# EAGLE board module_interface_hat v54 (EAGLE 9.7.0)
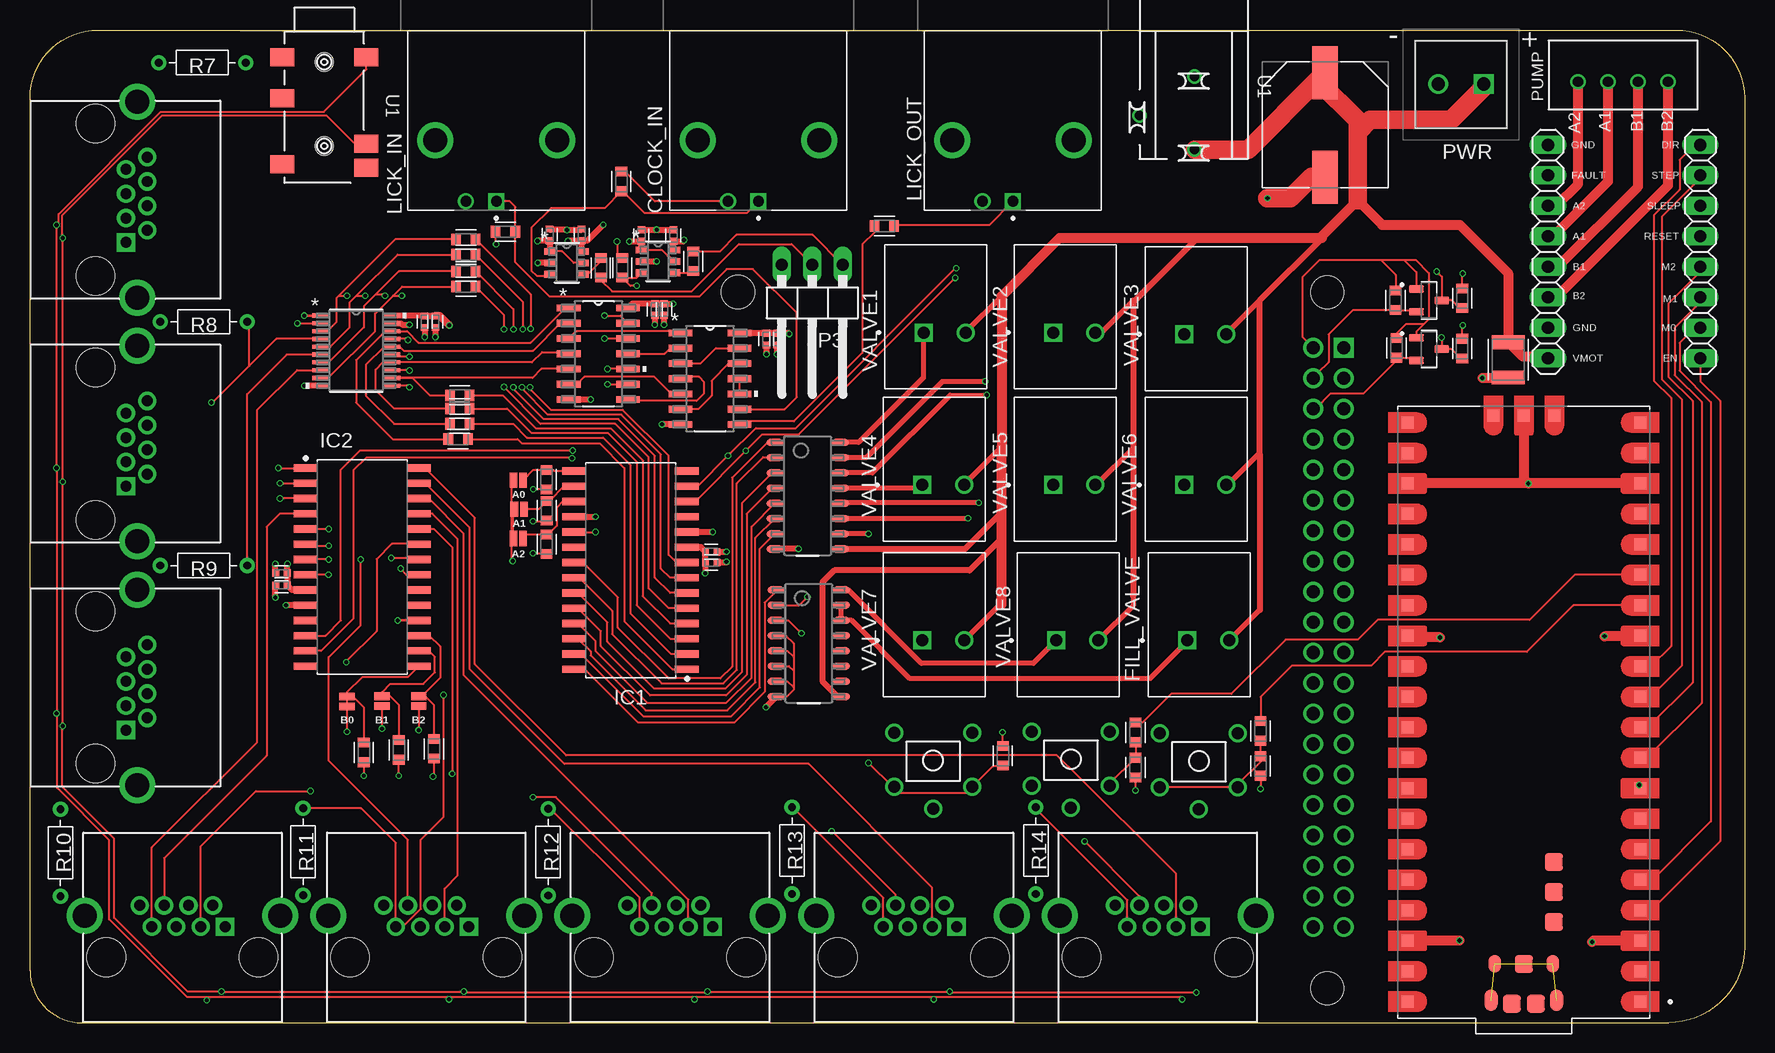
[diagram p0: board, top side]
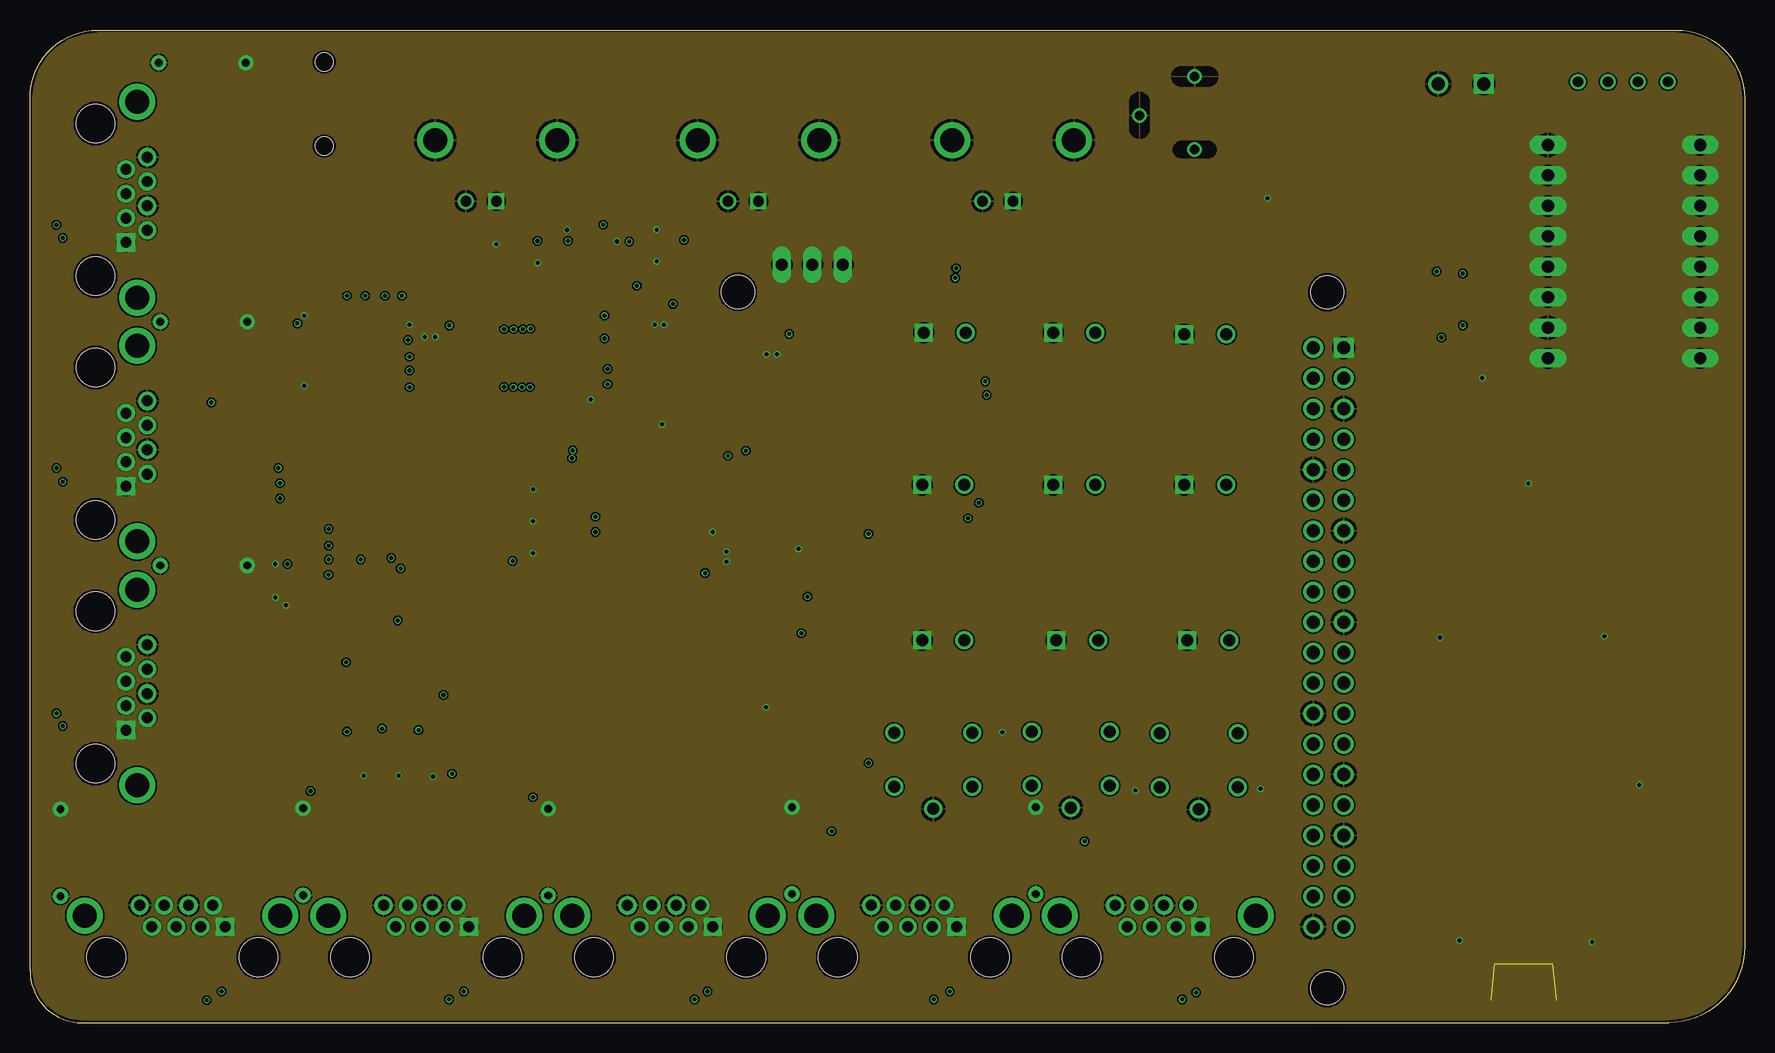
[diagram p1: board, inner layer Route2]
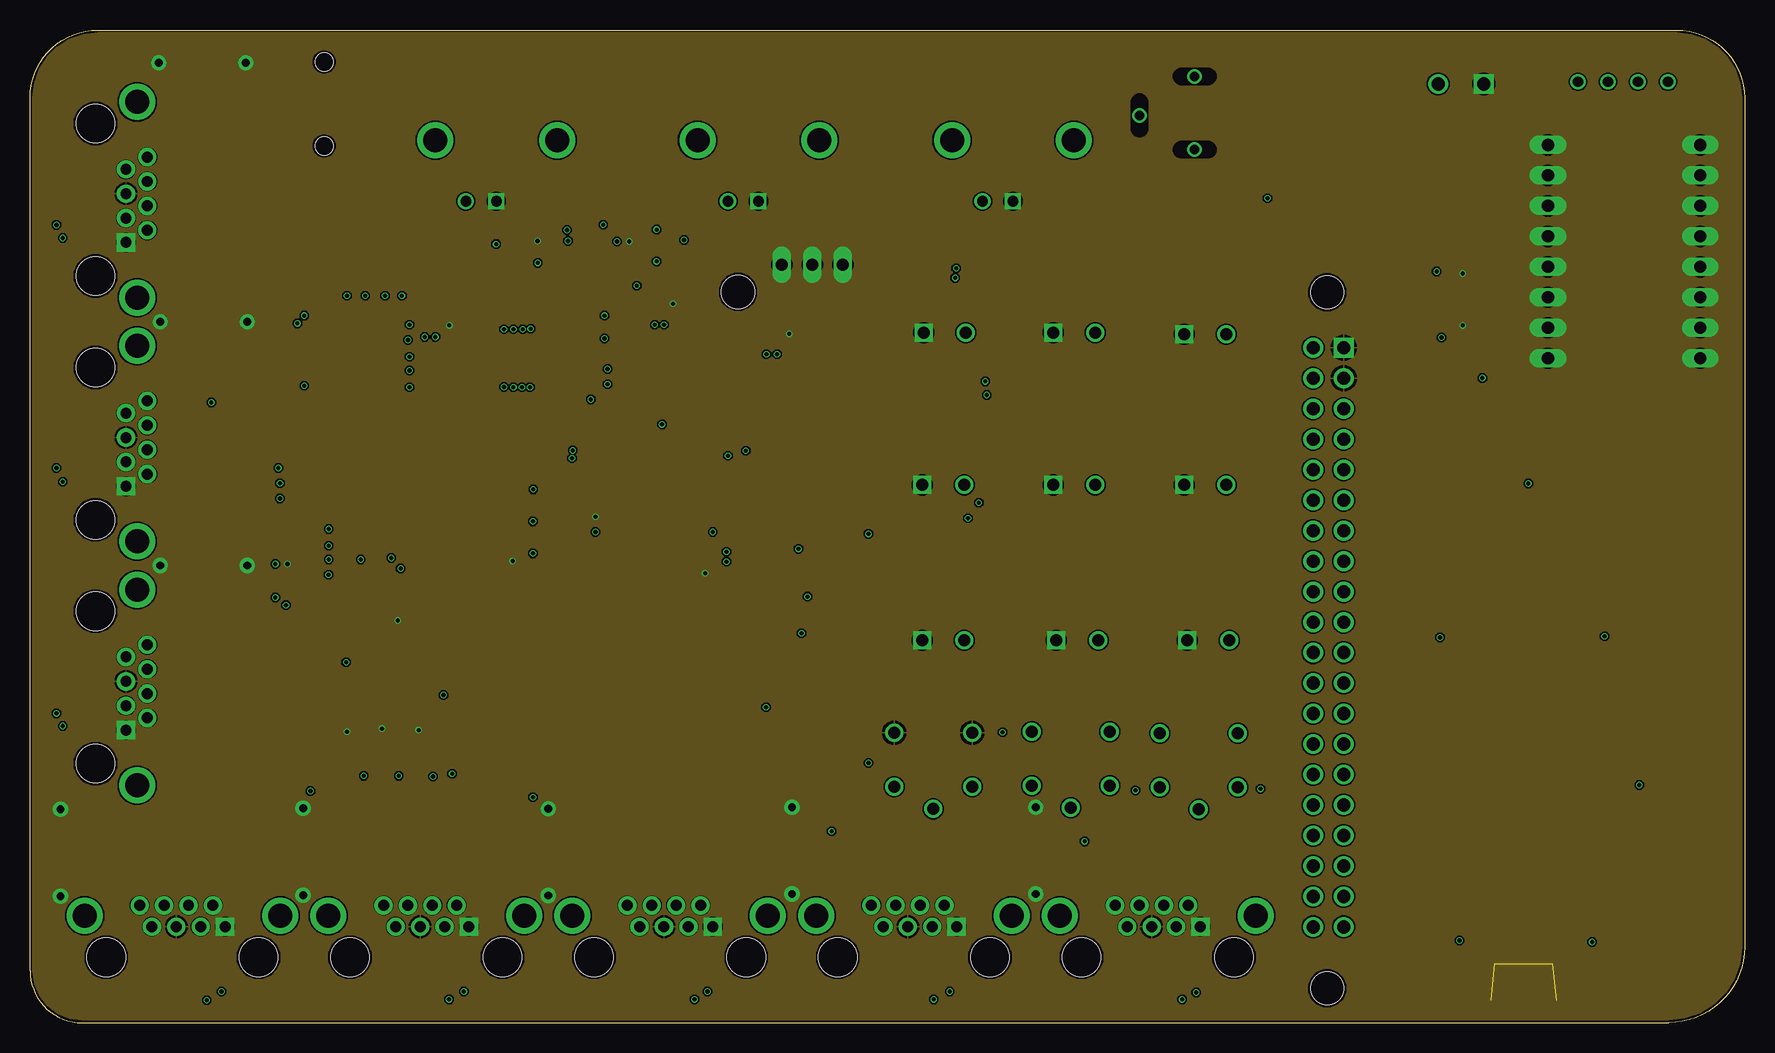
[diagram p2: board, inner layer Route15]
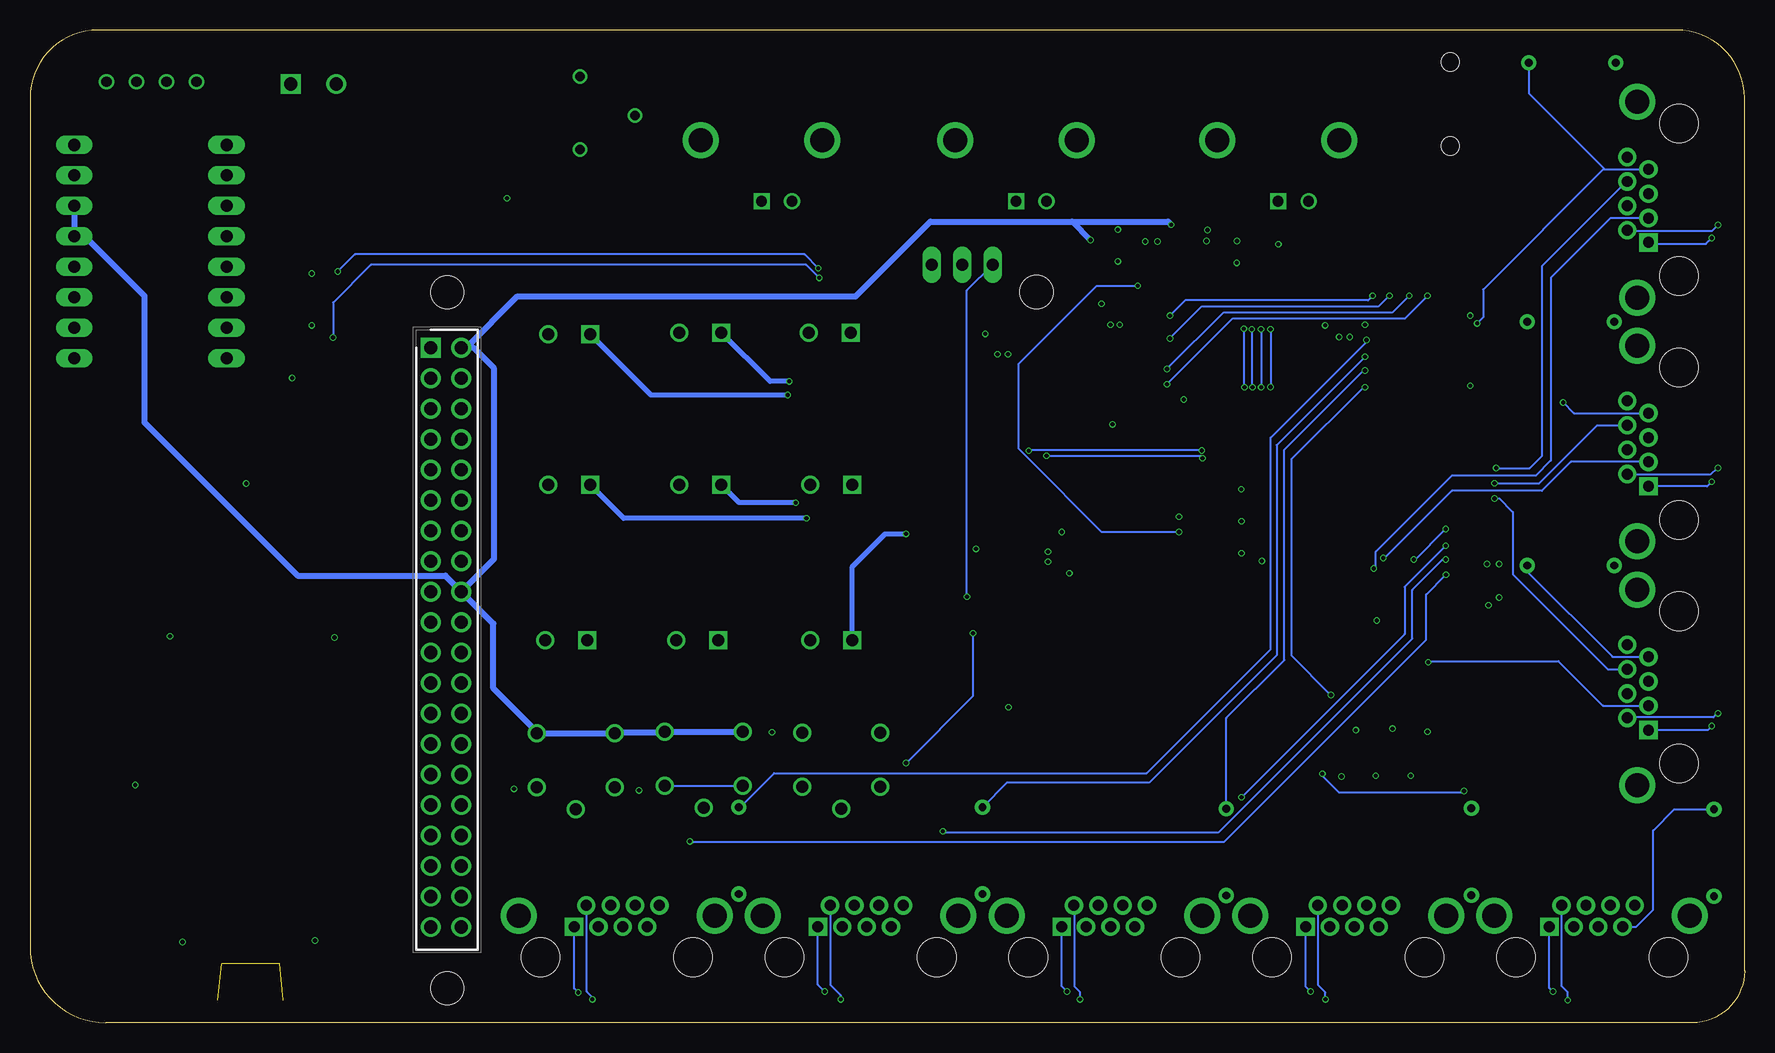
[diagram p3: board, bottom side, seen from below]

Size 142.88 x 82.73 mm. Coordinates in mm from the lower left corner, seen from the top.
Outline: 0,4.34 0,77.08 arc-90 5.65,82.73 137.22,82.73 arc-90 142.88,77.08 142.88,6.33 arc-90 136.54,0 4.34,0 arc-90 0,4.34
Copper layers (1*16): Top / Bottom
Stack-up Default Layer Stack: Top User Defined 0.035559375mm / Dielectric-1 User Defined 1.6mm / Bottom User Defined 0.035559375mm
Design rules: minimum drill size 12mil, minimum copper width 5mil, keepout clearance 0mil, drill distance 6mil, via restrict clearance 0mil, dimension clearance 8mil, restrict clearance 0mil, copper clearance wire_polygon to wire_polygon 5mil, copper clearance wire_polygon to pad_smd 5mil, copper clearance wire_polygon to via 5mil, copper clearance pad_smd to pad_smd 5mil, copper clearance pad_smd to via 5mil, copper clearance via to via 5mil, copper clearance smd to pad (same net) 5mil, copper clearance smd to via (same net) 5mil, copper clearance smd to smd (same net) 5mil
Holes 2.75 mm at 108.1,2.87 59,60.9 108.1,60.87

## Footprints (pad centres in the part's own frame; a part is rotated, then mirrored left to right if it is on the bottom)
SMT-JUMPER_2_NO_NO-SILK = smd 0.635 x 1.27: 1 -0.406,0; 2 0.406,0
PJ-3420-A-SMT = smd 1.5 x 2: 1 2.11,-3.49; 2 2.11,3.51; 3 5.51,-3.49; 4 9.31,3.51; 5 11.31,3.51; 6 11.01,-3.49 | hole 1.5: 2.5,0; 9.5,0
CAPC3225X135 = smd 1.165 x 2.715: 1 -1.475,0; 2 1.475,0
CAPAE1030X1050N = smd 4.416 x 2.115: 1 -4.353,0; 2 4.353,0
CAPC1005X60 = smd 0.56 x 0.629: 1 -0.485,0; 2 0.485,0
LINX_CONBNC002 = drill 0.89 square: 1 0,5.08 | drill 0.89: 2 2.54,5.08 | drill 2: S1 -5.08,0; S2 5.08,0
PHOENIX_1984963 = drill 1 square: 1 3.25,4.7 | drill 1: 2 6.75,4.7
SOIC127P1030X265-28 = smd 2 x 0.6: 1 -4.7,8.255; 2 -4.7,6.985; 3 -4.7,5.715; 4 -4.7,4.445; 5 -4.7,3.175; 6 -4.7,1.905; 7 -4.7,0.635; 8 -4.7,-0.635; 9 -4.7,-1.905; 10 -4.7,-3.175; 11 -4.7,-4.445; 12 -4.7,-5.715; 13 -4.7,-6.985; 14 -4.7,-8.255; 15 4.7,-8.255; 16 4.7,-6.985; 17 4.7,-5.715; 18 4.7,-4.445; 19 4.7,-3.175; 20 4.7,-1.905; 21 4.7,-0.635; 22 4.7,0.635; 23 4.7,1.905; 24 4.7,3.175; 25 4.7,4.445; 26 4.7,5.715; 27 4.7,6.985; 28 4.7,8.255
1X08 = drill 1.016 long: 1 -8.89,0; 2 -6.35,0; 3 -3.81,0; 4 -1.27,0; 5 1.27,0; 6 3.81,0; 7 6.35,0; 8 8.89,0
1X03/90 = drill 1.016 long: 1 -2.54,-3.81; 2 0,-3.81; 3 2.54,-3.81
HC-RJ45-5JA-1-4 = drill 0.914 pad 1.524 square: 1 3.556,0.381 | drill 0.914 pad 1.524: 2 2.54,2.159; 3 1.524,0.381; 4 0.508,2.159; 5 -0.508,0.381; 6 -1.524,2.159; 7 -2.54,0.381; 8 -3.556,2.159 | drill 2 pad 2.54: 9 -8.15,1.3; 10 8.15,1.3 | hole 3.2: -6.35,-2.159; 6.35,-2.159
DC-005-2.5A-2.0 = drill 0.8 slot 3 rotated 90: 1 7.5,4.6; 3 13.6,4.6 | drill 0.8 slot 3: 2 10.75,0
B4B-XH-A = drill 0.84: 1 0,0; 2 2.5,0; 3 5,0; 4 7.5,0
1727010 = drill 1.1 pad 1.65 square: 1 0,0 | drill 1.1 pad 1.65: 2 3.81,0
SOT95P240X111-3N = smd 1.23 x 0.6: 1 -1.06,0.95; 2 -1.06,-0.95; 3 1.06,0
RESC1608X60 = smd 0.799 x 0.974: 1 -0.815,0; 2 0.815,0
RESAD724W46L381D178B = drill 0.66 pad 1.26: 1 -3.62,0; 2 3.62,0
RHDR40W64P254_2X20_5130X500X16 = drill 1.1 pad 1.65 square: 1 0,0 | drill 1.1 pad 1.65: 2 0,2.54; 3 2.54,0; 4 2.54,2.54; 5 5.08,0; 6 5.08,2.54; 7 7.62,0; 8 7.62,2.54; 9 10.16,0; 10 10.16,2.54; 11 12.7,0; 12 12.7,2.54; 13 15.24,0; 14 15.24,2.54; 15 17.78,0; 16 17.78,2.54; 17 20.32,0; 18 20.32,2.54; 19 22.86,0; 20 22.86,2.54; 21 25.4,0; 22 25.4,2.54; 23 27.94,0; 24 27.94,2.54; 25 30.48,0; 26 30.48,2.54; 27 33.02,0; 28 33.02,2.54; 29 35.56,0; 30 35.56,2.54; 31 38.1,0; 32 38.1,2.54; 33 40.64,0; 34 40.64,2.54; 35 43.18,0; 36 43.18,2.54; 37 45.72,0; 38 45.72,2.54; 39 48.26,0; 40 48.26,2.54
TSSOP20_4P4X6P5_TEX = smd 1.41 x 0.356: 1 -2.953,2.925; 2 -2.953,2.275; 3 -2.953,1.625; 4 -2.953,0.975; 5 -2.953,0.325; 6 -2.953,-0.325; 7 -2.953,-0.975; 8 -2.953,-1.625; 9 -2.953,-2.275; 10 -2.953,-2.925; 11 2.953,-2.925; 12 2.953,-2.275; 13 2.953,-1.625; 14 2.953,-0.975; 15 2.953,-0.325; 16 2.953,0.325; 17 2.953,0.975; 18 2.953,1.625; 19 2.953,2.275; 20 2.953,2.925
MODULE_SC0915 = smd 1 x 1: 1 -9.69,24.13; 2 -9.69,21.59; 3 -9.69,19.05; 4 -9.69,16.51; 5 -9.69,13.97; 6 -9.69,11.43; 7 -9.69,8.89; 8 -9.69,6.35; 9 -9.69,3.81; 10 -9.69,1.27; 11 -9.69,-1.27; 12 -9.69,-3.81; 13 -9.69,-6.35; 14 -9.69,-8.89; 15 -9.69,-11.43; 16 -9.69,-13.97; 17 -9.69,-16.51; 18 -9.69,-19.05; 19 -9.69,-21.59; 20 -9.69,-24.13; 21 9.69,-24.13; 22 9.69,-21.59; 23 9.69,-19.05; 24 9.69,-16.51; 25 9.69,-13.97; 26 9.69,-11.43; 27 9.69,-8.89; 28 9.69,-6.35; 29 9.69,-3.81; 30 9.69,-1.27; 31 9.69,1.27; 32 9.69,3.81; 33 9.69,6.35; 34 9.69,8.89; 35 9.69,11.43; 36 9.69,13.97; 37 9.69,16.51; 38 9.69,19.05; 39 9.69,21.59; 40 9.69,24.13; D1 -2.54,-24.7; D2 0,-24.7; D3 2.54,-24.7 | smd 1.1 x 1.8: A -2.725,24; B 2.725,24 | smd 1.05 x 1.45: C -2.425,20.97; D 2.425,20.97 | smd 1.5 x 1.5: TP1 0,21; TP2 1,24.3; TP3 -1,24.3; TP4 -2.5,17.5; TP5 -2.5,15; TP6 -2.5,12.5
D14 = smd 1.981 x 0.559: 1 -2.464,3.81; 2 -2.464,2.54; 3 -2.464,1.27; 4 -2.464,0; 5 -2.464,-1.27; 6 -2.464,-2.54; 7 -2.464,-3.81; 8 2.464,-3.81; 9 2.464,-2.54; 10 2.464,-1.27; 11 2.464,0; 12 2.464,1.27; 13 2.464,2.54; 14 2.464,3.81
D0016A_N = smd 1.45 x 0.6: 1 -2.725,4.445; 2 -2.725,3.175; 3 -2.725,1.905; 4 -2.725,0.635; 5 -2.725,-0.635; 6 -2.725,-1.905; 7 -2.725,-3.175; 8 -2.725,-4.445; 9 2.725,-4.445; 10 2.725,-3.175; 11 2.725,-1.905; 12 2.725,-0.635; 13 2.725,0.635; 14 2.725,1.905; 15 2.725,3.175; 16 2.725,4.445
SOT-23-6_DBV_TEX = smd 0.978 x 0.559: 1 -1.365,0.95; 2 -1.365,0; 3 -1.365,-0.95; 4 1.365,-0.95; 5 1.365,0; 6 1.365,0.95
SKHHQYA010 = drill 1: P$1 0,0; P$2 6.5,0; P$3 6.5,-4.5; P$4 0,-4.5; P$5 3.25,-6.35

## Placement (x,y rotation side)
A0  JUMPER-SMT_2_NO_NO-SILK  [SMT-JUMPER_2_NO_NO-SILK]  40.69,45.22 0 top
A1  JUMPER-SMT_2_NO_NO-SILK  [SMT-JUMPER_2_NO_NO-SILK]  40.76,42.8 0 top
A2  JUMPER-SMT_2_NO_NO-SILK  [SMT-JUMPER_2_NO_NO-SILK]  40.69,40.36 0 top
AUDIO  PJ-3420-A-SMT  [PJ-3420-A-SMT]  24.51,82.56 270 top
B0  JUMPER-SMT_2_NO_NO-SILK  [SMT-JUMPER_2_NO_NO-SILK]  26.42,26.77 90 top
B1  JUMPER-SMT_2_NO_NO-SILK  [SMT-JUMPER_2_NO_NO-SILK]  29.34,26.8 90 top
B2  JUMPER-SMT_2_NO_NO-SILK  [SMT-JUMPER_2_NO_NO-SILK]  32.38,26.8 90 top
C1  100µF  [CAPC3225X135]  123.19,55.25 270 top
C2  100µF  [CAPAE1030X1050N]  107.92,74.82 270 top
C3  0.1µF  [CAPC1005X60]  52.07,59.44 270 top
C4  0.1µF  [CAPC1005X60]  61.37,56.97 270 top
C5  0.1µF  [CAPC1005X60]  32.89,58.42 270 top
C6  1µF  [CAPC1005X60]  52.83,59.44 270 top
C7  1µF  [CAPC1005X60]  62.26,56.97 270 top
C8  1µF  [CAPC1005X60]  33.78,58.42 270 top
C9  10µF  [CAPC1005X60]  20.96,37.47 180 top
C10  0.1µF  [CAPC1005X60]  20.96,36.45 180 top
C11  10µF  [CAPC1005X60]  56.77,39.24 0 top
C12  0.1µF  [CAPC1005X60]  56.77,38.35 0 top
C13  0.1µF  [CAPC1005X60]  43.31,65.66 90 top
C14  0.1µF  [CAPC1005X60]  45.97,65.66 90 top
C15  0.1µF  [CAPC1005X60]  50.95,65.61 90 top
C16  0.1µF  [CAPC1005X60]  53.62,65.61 90 top
CLOCK_IN  CONBNC002  [LINX_CONBNC002]  60.71,73.53 180 top
FILL_VALVE  1984963  [PHOENIX_1984963]  93.19,27.16 0 top
IC1  MCP23017-E/SO-SOIC  [SOIC127P1030X265-28]  50.04,37.72 180 top
IC2  MCP23017-E/SO-SOIC  [SOIC127P1030X265-28]  27.69,37.97 0 top
JP1  PINHD-1X8  [1X08]  139.19,64.26 90 top
JP2  PINHD-1X8  [1X08]  126.49,64.26 90 top
JP3  PINHD-1X3/90  [1X03/90]  65.2,59.35 180 top
LICK_IN  CONBNC002  [LINX_CONBNC002]  38.86,73.53 180 top
LICK_OUT  CONBNC002  [LINX_CONBNC002]  81.92,73.53 180 top
MOD1  HC-RJ45-5JA-1-4  [HC-RJ45-5JA-1-4]  7.62,68.58 270 top
MOD2  HC-RJ45-5JA-1-4  [HC-RJ45-5JA-1-4]  7.62,48.26 270 top
MOD3  HC-RJ45-5JA-1-4  [HC-RJ45-5JA-1-4]  7.62,27.94 270 top
MOD4  HC-RJ45-5JA-1-4  [HC-RJ45-5JA-1-4]  12.7,7.62 0 top
MOD5  HC-RJ45-5JA-1-4  [HC-RJ45-5JA-1-4]  33.02,7.62 0 top
MOD6  HC-RJ45-5JA-1-4  [HC-RJ45-5JA-1-4]  53.34,7.62 0 top
MOD7  HC-RJ45-5JA-1-4  [HC-RJ45-5JA-1-4]  73.66,7.62 0 top
MOD8  HC-RJ45-5JA-1-4  [HC-RJ45-5JA-1-4]  93.98,7.62 0 top
POWER  DC-005-2.5A-2.0  [DC-005-2.5A-2.0]  92.46,86.36 270 top
PUMP  B4B-XH-A  [B4B-XH-A]  129,78.41 0 top
PWR  1727010  [1727010]  121.16,78.23 180 top
Q3  BSS138  [SOT95P240X111-3N]  116.59,56.13 0 top
Q4  BSS138  [SOT95P240X111-3N]  116.59,60.2 0 top
R1  22kΩ  [RESC1608X60]  102.54,24.32 270 top
R2  22kΩ  [RESC1608X60]  92.13,24.19 270 top
R3  100kΩ  [RESC1608X60]  39.62,65.91 0 top
R4  22kΩ  [RESC1608X60]  102.54,21.4 90 top
R5  22kΩ  [RESC1608X60]  92.13,21.27 90 top
R6  22kΩ  [RESC1608X60]  81.07,22.25 270 top
R7  100kΩ  [RESAD724W46L381D178B]  14.35,80.01 0 top
R8  100kΩ  [RESAD724W46L381D178B]  14.48,58.42 0 top
R9  100kΩ  [RESAD724W46L381D178B]  14.48,38.1 0 top
R10  100kΩ  [RESAD724W46L381D178B]  2.54,14.16 90 top
R11  100kΩ  [RESAD724W46L381D178B]  22.75,14.24 90 top
R12  100kΩ  [RESAD724W46L381D178B]  43.18,14.22 90 top
R13  100kΩ  [RESAD724W46L381D178B]  63.5,14.35 90 top
R14  100kΩ  [RESAD724W46L381D178B]  83.82,14.35 90 top
R15  22kΩ  [RESC1608X60]  35.67,48.64 0 top
R16  22kΩ  [RESC1608X60]  35.81,49.91 0 top
R17  22kΩ  [RESC1608X60]  35.81,51.18 0 top
R18  22kΩ  [RESC1608X60]  35.81,52.28 0 top
R19  10kΩ  [RESC1608X60]  43.07,42.67 90 top
R20  10kΩ  [RESC1608X60]  43.05,45.25 90 top
R21  10kΩ  [RESC1608X60]  43.05,39.88 90 top
R22  10kΩ  [RESC1608X60]  30.73,22.73 90 top
R23  10kΩ  [RESC1608X60]  27.82,22.52 90 top
R24  10kΩ  [RESC1608X60]  33.66,22.82 90 top
R25  50Ω  [RESC1608X60]  71.2,66.39 180 top
R26  22kΩ  [RESC1608X60]  47.57,62.91 90 top
R27  50Ω  [RESC1608X60]  49.28,70.1 90 top
R28  10kΩ  [RESC1608X60]  113.87,56.23 90 top
R29  10kΩ  [RESC1608X60]  119.35,60.38 270 top
R30  10kΩ  [RESC1608X60]  119.35,56.19 90 top
R31  10kΩ  [RESC1608X60]  113.79,60.2 270 top
R32  22kΩ  [RESC1608X60]  36.32,61.34 0 top
R33  22kΩ  [RESC1608X60]  36.32,62.61 0 top
R34  22kΩ  [RESC1608X60]  36.32,64.01 0 top
R35  22kΩ  [RESC1608X60]  36.32,65.28 0 top
R36  22kΩ  [RESC1608X60]  55.27,63.45 270 top
R37  100kΩ  [RESC1608X60]  49.36,62.92 90 top
RPI_CONN  PRT-16763  [RHDR40W64P254_2X20_5130X500X16]  109.47,56.25 270 bottom
U1  SN74HCS244QPWRQ1TSSOP20_4P4X6P5_TEX  [TSSOP20_4P4X6P5_TEX]  27.18,56.01 0 top
U2  SC0915  [MODULE_SC0915]  124.49,25.89 180 top
U3  SN74HCT32DRD14  [D14]  47.37,55.75 0 top
U4  SN74HCT32DRD14  [D14]  56.67,53.67 0 top
U5  ULN2003ADRD0016A_N  [D0016A_N]  64.8,43.92 0 top
U6  ULN2003ADRD0016A_N  [D0016A_N]  64.9,31.62 0 top
U7  SN74LXC1T45DBVRSOT-23-6_DBV_TEX  [SOT-23-6_DBV_TEX]  52.35,63.45 0 top
U8  SN74LXC1T45DBVRSOT-23-6_DBV_TEX  [SOT-23-6_DBV_TEX]  44.73,63.32 0 top
U$1  SKHHQYA010  [SKHHQYA010]  94.16,24.12 0 top
U$2  SKHHQYA010  [SKHHQYA010]  83.49,24.26 0 top
U$3  SKHHQYA010  [SKHHQYA010]  72.01,24.16 0 top
VALVE1  1984963  [PHOENIX_1984963]  71.22,52.81 0 top
VALVE2  1984963  [PHOENIX_1984963]  82.02,52.81 0 top
VALVE3  1984963  [PHOENIX_1984963]  92.94,52.69 0 top
VALVE4  1984963  [PHOENIX_1984963]  71.09,40.11 0 top
VALVE5  1984963  [PHOENIX_1984963]  82.02,40.11 0 top
VALVE6  1984963  [PHOENIX_1984963]  92.94,40.11 0 top
VALVE7  1984963  [PHOENIX_1984963]  71.09,27.16 0 top
VALVE8  1984963  [PHOENIX_1984963]  82.27,27.16 0 top

## Library data of the parts
A0 A1 A2 B0 B1 B2 = SparkFun-Jumpers
AUDIO = XKB_Connectivity; JLCPCB_PART_NUMBER: C319102; MANUFACTURER: XKB Connectivity; MANUFACTURER_PART_NUMBER: PJ-3420-A-SMT
C1-C16 = Capacitor; CATEGORY: Capacitor
CLOCK_IN LICK_IN LICK_OUT = CONBNC002; AVAILABILITY: In Stock; CHECK_PRICES: https://www.snapeda.com/parts/CONBNC002/Linx/view-part/?ref=eda; DESCRIPTION: BNC Jack 50 Ohm PCB Through Hole; MF: Linx Technologies Inc.; MP: CONBNC002; PACKAGE: None; PRICE: None; PURCHASE-URL: https://www.snapeda.com/api/url_track_click_mouser/?unipart_id=10849425&manufacturer=Linx Technologies Inc.&part_name=CONBNC002&search_term=None; SNAPEDA_LINK: https://www.snapeda.com/parts/CONBNC002/Linx/view-part/?ref=snap
FILL_VALVE VALVE1-VALVE8 = 1727010; MANUFACTURER: Phoenix Contact; MAXIMUM_PACKAGE_HEIGHT: 13.1mm; PARTREV: 18.07.2018; STANDARD: Manufacturer Recommendations
IC1 IC2 = IC_Interface; CATEGORY: IC_Interface; DESCRIPTION: I/O Expander 16 I²C 1.7MHz; MANUFACTURER: Microchip Technology; MPN: MCP23017-E/SO; OPERATING_TEMP: -40°C to 125°C; PART_STATUS: Active; ROHS_COMPLIANT: ROHS3 Compliant; SUB-CATEGORY: I/O Expander; TYPE: 16 bit
JP1 JP2 = Connector; CATEGORY: Headers; DESCRIPTION: Header, Straight, 8 Position; MANUFACTURER: Generic; MPN: Generic; OPERATING_TEMPERATURE: Generic; PART_STATUS: Active; PITCH: 0.100" (2.54mm); ROHS_COMPLIANCE: Generic; SERIES: Generic; SUB-CATEGORY: Headers, Male Pins; TYPE: Board to Board or Cable, Unshrouded, Through Hole, Straight
JP3 = Connector; CATEGORY: Headers; DESCRIPTION: Header, Right Angle, 3 Position; MANUFACTURER: Generic; MPN: Generic; OPERATING_TEMPERATURE: Generic; PART_STATUS: Active; PITCH: 0.100" (2.54mm); ROHS_COMPLIANCE: Generic; SERIES: Generic; SUB-CATEGORY: Headers, Male Pins; TYPE: Board to Board or Cable, Unshrouded, Through Hole, Right Angle
MOD1-MOD8 = HCTL
POWER = XKB_Connectivity; MANUFACTURER: XKB Connectivity; MANUFACTURER_PART_NUMBER: DC-005-2.5A-2.0
PUMP = Connector; CATEGORY: Header; DSECRIPTION: Connector Header Through Hole 4 position 0.098" (2.50mm); MANUFACTURER: JST Sales America Inc.; MPN: B4B-XH-A(LF)(SN); OPERATING_TEMPERATURE: -25 C to 85 C; PART_STATUS: ACTIVE; PITCH: 0.098" (2.50mm); ROHS_COMPLIANCE: ROHS3 Compliant; SERIES: XH; SUB_CATEGORY: Rectangular Connectors; TYPE: Header, Male Pin, Board to Cable/Wire, Through Hole
PWR = 1727010; DESCRIPTION: Conn PC Terminal Block 2 POS 3.81mm Solder ST Thru-Hole 13.5A; HEIGHT: 8.65mm; MANUFACTURER_NAME: Phoenix Contact; MANUFACTURER_PART_NUMBER: 1727010; MOUSER_PART_NUMBER: 651-1727010; MOUSER_PRICE-STOCK: https://www.mouser.co.uk/ProductDetail/Phoenix-Contact/1727010?qs=JcjeNNoqGSMjtHhQoBJ7UA%3D%3D
Q3 Q4 = BSS138; AVAILABILITY: In Stock; DESCRIPTION: N-Channel 50 V 200mA (Ta) 225mW (Ta) Surface Mount SOT-23-3 (TO-236); MF: ON Semiconductor; MP: BSS138; PACKAGE: SOT-23 ON; PRICE: None
R1-R37 = Resistor; CATEGORY: Resistor; SUB-CATEGORY: Fixed
RPI_CONN = PRT-16763; DESCRIPTION: Headers & Wire Housings Extended GPIO Female Header - 2x20 Pin (16mm/7.30mm); HEIGHT: 16.25mm; MANUFACTURER_NAME: SparkFun; MANUFACTURER_PART_NUMBER: PRT-16763; MOUSER_PART_NUMBER: 474-PRT-16763; MOUSER_PRICE-STOCK: https://www.mouser.co.uk/ProductDetail/SparkFun/PRT-16763?qs=W%2FMpXkg%252BdQ5xeCq%2FGKjnlQ%3D%3D
U1 = 2024-03-31_00-23-18_Library; COPYRIGHT: Copyright (C) 2024 Ultra Librarian. All rights reserved.; MANUFACTURER_PART_NUMBER: SN74HCS244QPWRQ1; MFR_NAME: Texas Instruments
U2 = SC0915; MANUFACTURER: Pi Supply; PARTREV: 1.9; SNAPEDA_PN: SC0915; STANDARD: Manufacturer Recommendations
U3 U4 = 2023-12-07_08-39-36_Library; COPYRIGHT: Copyright (C) 2023 Ultra Librarian. All rights reserved.; MANUFACTURER_PART_NUMBER: SN74HCT32DR; MFR_NAME: Texas Instruments
U5 U6 = 2023-12-07_08-28-53_Library; COPYRIGHT: Copyright (C) 2023 Ultra Librarian. All rights reserved.; MANUFACTURER_PART_NUMBER: ULN2003ADR; MFR_NAME: Texas Instruments; REFDES: RefDes; TYPE: TYPE
U7 U8 = 2024-04-06_11-04-47_Library; COPYRIGHT: Copyright (C) 2024 Ultra Librarian. All rights reserved.; MANUFACTURER_PART_NUMBER: SN74LXC1T45DBVR; MFR_NAME: Texas Instruments
U$1-U$3 = SKHHQYA010

## Nets
3V3_OUT: U2.36
+3.3V: C14.1 C16.1 JP1.5 JP1.6 Q3.1 Q4.1 R28.2 R31.1 RPI_CONN.2 RPI_CONN.18 U7.6 U8.6 U$1.P$1 U$1.P$2 U$2.P$1 U$2.P$2
+5V: A0.1 A1.1 A2.1 B0.1 B0.2 B1.1 B2.1 C3.1 C4.1 C5.1 C6.1 C7.1 C8.1 C9.1 C10.1 C11.1 C12.1 C13.1 C15.1 IC1.9 IC1.18 IC2.9 IC2.15 IC2.18 MOD1.5 MOD2.5 MOD3.5 MOD4.5 MOD5.5 MOD6.5 MOD7.5 MOD8.5 R23.2 R29.1 R30.2 RPI_CONN.1 RPI_CONN.3 U1.20 U3.14 U4.14 U7.1 U7.5 U8.1 U8.5 U$3.P$1 U$3.P$2
+12V: C1.1 C2.1 FILL_VALVE.2 JP2.1 POWER.3 PWR.1 U5.9 U6.9 VALVE1.2 VALVE2.2 VALVE3.2 VALVE4.2 VALVE5.2 VALVE6.2 VALVE7.2 VALVE8.2
A1: JP2.5 PUMP.2
A2: JP2.6 PUMP.1
A+: AUDIO.4 MOD1.1 MOD2.1 MOD3.1 MOD4.1 MOD5.1 MOD6.1 MOD7.1 MOD8.1
A-: AUDIO.2 MOD1.2 MOD2.2 MOD3.2 MOD4.2 MOD5.2 MOD6.2 MOD7.2 MOD8.2
ADC_VREF: U2.35
AGND: U2.33
B1: JP2.4 PUMP.3
B2: JP2.3 PUMP.4
CLOCK_IN: JP3.2 R26.1
DIR: JP1.8 U2.12
ENABLE: JP1.1 U2.4
FILL_VALVE: FILL_VALVE.1 U6.14 U6.15
FILL_VALVE_MAN: R6.2 U6.3 U$3.P$3 U$3.P$4
FILL_VALVE_PROG: JP3.3 U6.2
FLUSH: R1.1 U2.14
GND: C1.2 C2.2 C3.2 C4.2 C5.2 C6.2 C7.2 C8.2 C9.2 C10.2 C11.2 C12.2 C13.2 C14.2 C15.2 C16.2 CLOCK_IN.2 CLOCK_IN.S1 CLOCK_IN.S2 IC1.10 IC2.10 JP2.2 JP2.8 LICK_IN.2 LICK_IN.S1 LICK_IN.S2 LICK_OUT.2 LICK_OUT.S1 LICK_OUT.S2 MOD1.4 MOD1.8 MOD2.4 MOD2.8 MOD3.4 MOD3.8 MOD4.4 MOD4.8 MOD5.4 MOD5.8 MOD6.4 MOD6.8 MOD7.4 MOD7.8 MOD8.4 MOD8.8 POWER.1 POWER.2 PWR.2 R3.1 R4.1 R5.1 R6.1 R7.1 R8.1 R9.1 R10.1 R11.1 R12.1 R13.1 R14.1 R19.1 R20.1 R21.1 R22.1 R23.1 R24.1 R27.2 R37.2 RPI_CONN.5 RPI_CONN.10 RPI_CONN.13 RPI_CONN.19 RPI_CONN.26 RPI_CONN.29 RPI_CONN.33 RPI_CONN.40 U1.1 U1.10 U1.19 U2.3 U2.8 U2.13 U2.18 U2.23 U2.28 U2.38 U2.D2 U3.7 U4.7 U5.8 U6.4 U6.5 U6.6 U6.7 U6.8 U7.2 U8.2 U$1.P$5 U$2.P$5 U$3.P$5
LED1: IC2.1 MOD1.6
LED2: IC2.2 MOD2.6
LED3: IC2.3 MOD3.6
LED4: IC2.4 MOD4.6
LED5: IC2.5 MOD5.6
LED6: IC2.6 MOD6.6
LED7: IC2.7 MOD7.6
LED8: IC2.8 MOD8.6
LICK1: MOD1.7 R7.2 U1.2
LICK1_2_5_6_OR: U4.3 U4.13
LICK1_2_OR: U3.3 U4.1
LICK1_DIG: R15.1 U1.18 U3.1
LICK2: MOD2.7 R8.2 U1.4
LICK2_DIG: R16.1 U1.16 U3.2
LICK3: MOD3.7 R9.2 U1.6
LICK3_4_7_8_OR: U4.6 U4.12
LICK3_4_OR: U3.6 U4.5
LICK3_DIG: R17.1 U1.14 U3.4
LICK4: MOD4.7 R10.2 U1.8
LICK4_DIG: R18.1 U1.12 U3.5
LICK5: MOD5.7 R11.2 U1.11
LICK5_6_OR: U3.11 U4.2
LICK5_DIG: R32.1 U1.9 U3.13
LICK6: MOD6.7 R12.2 U1.13
LICK6_DIG: R33.1 U1.7 U3.12
LICK7: MOD7.7 R13.2 U1.15
LICK7_8_OR: U3.8 U4.4
LICK7_DIG: R34.1 U1.5 U3.10
LICK8: MOD8.7 R14.2 U1.17
LICK8_DIG: R35.1 U1.3 U3.9
LICK_BUS_INT: IC1.19 R37.1 U7.3
LICK_BUS_INT2: JP3.1 R36.1
LICK_IN: LICK_IN.1 R3.2 U4.9
LICK_OUT: R25.2 U4.8
M0: JP1.2 U2.5
M1: JP1.3 U2.9
M2: JP1.4 U2.10
MOD_OR: U4.10 U4.11
N$1: A0.2 IC1.15 R20.2
N$2: A1.2 IC1.16 R19.2
N$3: A2.2 IC1.17 R21.2
N$4: LICK_OUT.1 R25.1
N$5: B1.2 IC2.16 R22.2
N$6: B2.2 IC2.17 R24.2
N$7: CLOCK_IN.1 R27.1 U8.3
N$8: R26.2 U8.4
N$10: IC1.1 R15.2
N$11: IC1.2 R16.2
N$12: IC1.3 R17.2
N$13: IC1.4 R18.2
N$14: IC1.5 R32.2
N$15: IC1.6 R33.2
N$16: IC1.7 R34.2
N$17: IC1.8 R35.2
N$18: R36.2 U7.4
N$36: R1.2 R4.2 U$1.P$3 U$1.P$4
N$37: R2.2 R5.2 U$2.P$3 U$2.P$4
REV: R2.1 U2.15
SCL: IC1.12 IC2.12 Q3.3 R30.1
SCL_PI: Q3.2 R28.1 RPI_CONN.6
SD1: IC2.21 MOD1.3
SD2: IC2.22 MOD2.3
SD3: IC2.23 MOD3.3
SD4: IC2.24 MOD4.3
SD5: IC2.25 MOD5.3
SD6: IC2.26 MOD6.3
SD7: IC2.27 MOD7.3
SD8: IC2.28 MOD8.3
SDA: IC1.13 IC2.13 Q4.3 R29.2
SDA_PI: Q4.2 R31.2 RPI_CONN.4
STEP: JP1.7 U2.11
TP1_GND: U2.TP1
USB_SHIELD: U2.A U2.B U2.C U2.D
VALVE1: U5.16 VALVE1.1
VALVE1_PROG: IC1.21 U5.1
VALVE2: U5.15 VALVE2.1
VALVE2_PROG: IC1.22 U5.2
VALVE3: U5.14 VALVE3.1
VALVE3_PROG: IC1.23 U5.3
VALVE4: U5.13 VALVE4.1
VALVE4_PROG: IC1.24 U5.4
VALVE5: U5.12 VALVE5.1
VALVE5_PROG: IC1.25 U5.5
VALVE6: U5.11 VALVE6.1
VALVE6_PROG: IC1.26 U5.6
VALVE7: U5.10 VALVE7.1
VALVE7_PROG: IC1.27 U5.7
VALVE8: U6.16 VALVE8.1
VALVE8_PROG: IC1.28 U6.1
VBUS: U2.40
VSYS: U2.39

## Tracks (layer width: path | path; a pad name or v marks a point on that pad's centre or on a via)
+3.3V  (via drill 0.35)
  Top 0.152: Q4.1 115.53,62.55 114.5,63.57 | 112.55,63.57 107.46,63.57 106.06,62.18 106.06,57.11 RPI_CONN.2 | 112.55,63.57 114.5,63.57 | 114.05,61.27 R31.1 113.79,62.33 112.55,63.57 | 114.5,63.57 115.47,63.57 116.57,62.46 116.57,58.64 | 116.14,58.2 115.53,57.59 Q3.1 | 116.14,58.2 114.64,58.2 113.87,57.43 R28.2 | 116.57,58.64 116.57,58.62 | 116.57,58.64 116.14,58.2
  Top 0.508: U8.6 45.97,64.29 C14.1 | C14.1 45.95,65.15 v44.83,65.15 | v47.77,66.5 46.45,65.17 C14.1 | v54.51,65.23 54.4,65.12 C16.1 53.62,64.49 U7.6
  Bottom 0.508: 139.06,65.53 138.3,65.53 133.35,60.58 133.35,50.04 120.57,37.26 108.26,37.26 RPI_CONN.18 | 139.06,65.53 JP1.5 | JP1.6 139.19,65.66 139.06,65.53 | RPI_CONN.18 104.27,33.26 104.27,27.85 100.66,24.25 U$1.P$2 U$1.P$1 94.06,24.22 90.03,24.22 U$2.P$2 U$2.P$1 | RPI_CONN.18 104.2,38.65 104.2,54.54 105.91,56.25 RPI_CONN.2 106.54,56.25 102.26,60.53 74.06,60.53 67.84,66.75 56.03,66.75 | 56.03,66.75 48.03,66.75 v47.77,66.5 | v54.51,65.23 56.03,66.75
+5V  (via drill 0.35)
  Top 0.152: B0.2 B0.1 v26.42,24.26 | v29.34,24.51 B1.1 | B2.1 v32.38,24.38 | R23.2 27.82,26.28 26.92,27.18 B0.2 | B0.2 26.42,27.53 27.69,28.8 31.47,28.8 IC2.15 | A0.1 40.28,44.7 40.16,44.58 40.16,43 | A2.1 40.23,40.41 40.23,42.67 A1.1 40.16,43 | v40.22,38.48 40.16,38.48 40.16,43 | U8.1 44.35,64.27 45.3,63.32 U8.5 | R29.1 119.35,62.38 v119.4,62.43 | R30.2 119.35,58.06 v119.4,58.11 | U7.5 53.24,63.91 53.14,63.91 52.66,64.4 U7.1
  Top 0.2: IC2.18 v30.65,33.53
  Top 0.508: 56.26,38.35 C12.1 | C12.1 C11.1 55.9,39.62 IC1.9 | C12.1 56.28,37.49 v56.26,37.47 | IC1.18 v47.12,42.16 | 32.41,33.51 IC2.18 | IC2.9 21.82,36.07 C10.1 C9.1 21.44,38.23 v21.46,38.23 | U3.14 50.19,59.92 C3.1 C6.1 53.56,59.92 v53.58,59.91 | U4.14 61.34,57.48 C4.1 C7.1 63.22,57.46 v63.27,57.41 | U8.1 43.36,65.12 C13.1 42.29,65.17 v42.29,65.15 | C8.1 C5.1 31.29,58.91 31.26,58.93 U1.20 | v49.93,65.1 50.93,65.1 C15.1 50.95,64.43 U7.1
  Top 0.61: C8.1 34.16,58.91 v34.95,58.11
  pour Route15: 4.34,0 arc-90 0,4.34 0,77.03 arc-90 5.7,82.73 137.19,82.73 arc-90 142.85,77.06 142.85,6.31 arc-90 136.55,0
+12V
  Top 0.406: 67.32,27.18 U6.9 | 80.96,47.99 77.84,44.87 VALVE4.2 | 80.96,34.84 80.82,34.84 VALVE7.2 | 80.96,60.56 77.97,57.57 VALVE1.2 | 91.92,60.18 89.25,57.51 VALVE2.2 | 91.92,47.86 88.87,44.81 VALVE5.2 | 91.92,35.54 91.92,34.76 VALVE8.2 | 102.49,60.21 99.69,57.4 VALVE3.2 | 102.49,47.37 102.37,47.37 99.81,44.81 VALVE6.2 | 102.49,34.41 FILL_VALVE.2
  Top 0.508: 97.25,65.39 91.92,60.05 | 91.92,60.18 91.92,60.05 | 91.92,60.05 91.92,47.86 91.92,35.54 | 67.32,27.18 66.04,28.46 66.04,36.7 67.04,37.7 78.29,37.7 80.96,40.37 | 102.49,34.41 102.49,47.37 102.49,60.21 107.67,65.39 | 80.96,42.53 77.91,39.48 U5.9
  Top 0.813: 107.67,65.39 107.49,65.39 | 107.49,65.39 97.25,65.39 85.78,65.39 80.96,60.56 80.96,47.99 80.96,42.53 80.96,40.37 80.96,34.84 | JP2.1 126.36,55.5 124.41,55.5 C1.1 123.17,56.74 123.17,62.48 119.15,66.5 112.67,66.5 110.63,68.54 | 107.49,65.39 110.63,68.52
  Top 1.524: 110.63,74.18 110.63,75.2 107.41,78.41 107.41,78.67 | 110.63,74.18 111.7,75.25 118.44,75.25 121.16,77.97 PWR.1 | POWER.3 101.51,72.76 107.41,78.67 | 107.41,78.67 C2.1 | 110.63,74.18 110.63,68.54 110.63,68.52
A1
  Top 0.813: JP2.5 126.52,65.51 126.9,65.51 131.5,70.11 PUMP.2
A2
  Top 0.813: JP2.6 127.18,68.07 129,69.89 PUMP.1
A+  (via drill 0.35)
  Top 0.152: 2.67,24.79 2.67,19.69 7.01,15.34 7.01,8.74 13.15,2.6 v15.96,2.6 15.96,2.54 36.16,2.54 | 2.67,45.09 2.67,24.79 | v97.18,2.52 97.16,2.54 76.64,2.54 | 2.67,65.39 2.67,45.09 | 2.67,65.39 v2.73,65.39 | 76.64,2.54 56.45,2.54 | 36.16,2.54 56.45,2.54 | 2.67,45.09 v2.73,45.09 | 2.67,24.79 v2.73,24.73 | v36.16,2.6 36.16,2.54 | 56.45,2.54 v56.45,2.6 | v76.64,2.6 76.64,2.54 | AUDIO.4 27.89,73.38 26.93,73.38 24.69,75.62 11.01,75.62 2.67,67.28 2.67,65.39
  Bottom 0.152: MOD3.1 3.05,24.38 2.73,24.71 v2.73,24.73 | v97.18,2.52 97.54,2.87 MOD8.1 | MOD1.1 7.87,64.9 3.22,64.9 v2.73,65.39 | v2.73,45.09 3.11,44.7 MOD2.1 | v15.96,2.6 16.26,2.89 MOD4.1 | v36.16,2.6 36.58,3.02 MOD5.1 | v56.45,2.6 56.9,3.04 MOD6.1 | v76.64,2.6 77.22,3.17 MOD7.1
A-  (via drill 0.35)
  Top 0.152: 14.73,2.13 13.09,2.13 6.6,8.62 6.6,15.23 2.26,19.57 2.26,25.78 | 75.31,2.13 55.37,2.13 | 55.37,2.13 34.92,2.13 | 2.26,25.78 2.26,46.23 | 2.26,46.23 2.2,46.29 v2.2,66.48 2.39,66.67 2.39,67.39 10.89,75.9 24.48,75.9 28.02,79.44 AUDIO.2 | 2.26,46.23 v2.2,46.23 | v2.2,25.78 2.26,25.78 | 14.73,2.13 v14.73,1.88 | v34.92,1.95 34.92,2.13 | v55.37,1.95 55.37,2.13 | v75.31,1.95 75.31,2.13 | v96.01,1.95 95.83,2.13 75.31,2.13 | 34.92,2.13 14.73,2.13
  Bottom 0.152: v2.2,66.48 2.69,65.99 9.73,65.99 MOD1.2 | MOD8.2 96.47,9.73 96.47,2.59 96.01,2.13 v96.01,1.95 | MOD7.2 76.15,9.73 76.15,3.12 75.31,2.29 v75.31,1.95 | MOD6.2 55.83,9.73 55.83,3.02 55.37,2.56 v55.37,1.95 | MOD2.2 2.79,45.72 2.29,46.23 v2.2,46.23 | MOD3.2 9.65,25.4 9.6,25.45 2.59,25.45 2.26,25.78 v2.2,25.78 | MOD5.2 35.51,9.73 35.51,3.12 34.92,2.54 v34.92,1.95 | v14.73,1.88 14.73,2.54 15.24,3.04 MOD4.2
B1
  Top 0.813: JP2.4 127.31,62.99 134,69.69 PUMP.3
B2
  Top 0.813: PUMP.4 136.5,69.77 127.31,60.58 126.62,60.58 JP2.3
CLOCK_IN
  Top 0.152: 47.57,62.02 R26.1 47.57,61.89 48.52,60.95 55.14,60.95 59.08,64.89 63.47,64.89 JP3.2
DIR
  Top 0.152: U2.12 135.07,29.7 136.75,31.38 136.75,52.07 135.33,53.49 135.33,67.29 137.46,69.42 137.46,71.9 138.72,73.15 JP1.8
ENABLE
  Top 0.152: JP1.1 139.19,53.47 140.84,51.82 140.84,15.13 135.09,9.38 U2.4
FILL_VALVE
  Top 0.406: U6.15 U6.14 68.47,33.53 73.31,28.68 93.32,28.68 96.44,31.81 FILL_VALVE.1
FILL_VALVE_MAN  (via drill 0.35)
  Top 0.152: U6.3 63.18,33.53 64.25,32.46 v64.28,32.46 | R6.2 80.28,21.43 U$3.P$3 78,19.15 72.52,19.15 U$3.P$4 71.88,19.66 69.9,21.64 v69.87,21.64
  Bottom 0.152: v69.87,21.64 64.28,27.23 v64.28,32.46
FILL_VALVE_PROG  (via drill 0.35)
  Top 0.152: U6.2 64.08,34.8 v64.79,35.51
  Bottom 0.152: v64.79,35.51 64.79,61.02 JP3.3
FLUSH
  Top 0.152: R1.1 102.54,27.16 105.15,29.77 111.75,29.77 112.89,30.91 124.74,30.91 128.61,34.78 U2.14
GND  (via drill 0.35)
  Top 0.152: U6.4 62.99,32.26 63.63,31.62 63.63,30.48 | 63.63,30.48 63.63,29.34 | 63.63,29.34 63.63,27.94 | 63.63,27.94 63.63,27.74 63.06,27.18 U6.8 | U6.5 63.12,30.99 63.63,30.48 | U6.6 63.25,29.72 63.63,29.34 | U6.7 63.12,28.45 63.63,27.94 | R23.1 v27.82,20.58 v27.81,20.57 | v30.73,20.57 R22.1 | R19.1 42.99,41.78 v41.91,41.78 | R21.1 41.96,39.06 v41.91,39.12 | R4.1 v102.54,19.49 | v92.13,19.36 R5.1 | 49.15,71.05 R27.2 49.6,70.92 52.07,68.45 CLOCK_IN.2 | R24.1 33.66,20.6 v33.58,20.52 | R6.1 81.07,24.18 v81.05,24.2 | R20.1 41.94,44.44 v41.93,44.45 | v48.92,65.1 48.92,64.96 48.98,64.9 48.98,64.11 R37.2 | v38.84,64.88 38.81,64.92 R3.1
  Top 0.2: U1.1 v22.86,58.93
  Top 0.508: C5.2 v32.89,57.15 | C8.2 v33.78,57.15 | v62.26,55.7 C7.2 | C4.2 v61.37,55.7 | C6.2 v52.83,58.17 | C3.2 v52.07,58.17 | U3.7 v46.74,51.94 | U1.10 v22.86,53.08 v22.86,53.09 | C11.2 v58.04,39.24 | v56.9,40.89 IC1.10 | v64.04,39.49 62.08,39.49 U5.8 | U6.8 61.34,26.35 v61.34,26.29 | C12.2 58.04,38.35 v58.04,38.41 | v20.45,38.23 20.45,37.49 C9.2 | C10.2 20.45,36.43 v20.45,35.43 | IC2.10 v21.34,34.8 | C13.2 43.38,66.07 v44.75,66.07 45.9,66.07 C14.2 | v31.62,58.17 31.02,58.17 30.9,58.28 U1.19 | U8.2 v42.31,63.32 | U4.7 v52.67,49.86 | C15.2 v52.22,66.09 C16.2 | U7.2 v52.22,63.45
  Top 0.813: C1.2 123.19,53.72 v121.03,53.72 | U2.18 v124.86,44.94 | v124.86,44.94 U2.23 114.8,44.96 | v117.5,32.11 114.93,32.11 U2.28 113.77,32.24 | U2.3 130.28,6.84 v130.17,6.73 | v119.13,6.86 119.11,6.84 U2.38 | U2.8 134.11,19.61 v134.11,19.81 | U2.D2 124.49,45.31 v124.86,44.94 | U2.13 134.15,32.2 v131.21,32.2
  Top 1.524: C2.2 107.9,70.48 106.81,70.48 105.03,68.71 v103.12,68.71
  pour Route2: 4.34,0 arc-90 0,4.34 0,77.03 arc-90 5.7,82.73 137.19,82.73 arc-90 142.85,77.06 142.85,6.31 arc-90 136.55,0
LED1  (via drill 0.35)
  Top 0.152: v20.7,46.23 IC2.1
  Bottom 0.152: MOD1.6 9.83,70.1 16.87,63.07 16.87,47.27 17.9,46.23 v20.7,46.23
LED2  (via drill 0.35)
  Top 0.152: v20.83,44.96 IC2.2
  Bottom 0.152: MOD2.6 12.27,49.78 17.09,44.96 v20.83,44.96
LED3  (via drill 0.35)
  Top 0.152: IC2.3 v20.83,43.69
  Bottom 0.152: MOD3.6 9.8,29.44 11.38,29.44 19.31,37.37 19.31,42.55 20.45,43.69 v20.83,43.69
LED4
  Top 0.152: MOD4.6 11.18,13.72 19.73,22.27 19.73,41.32 20.83,42.42 IC2.4
LED5  (via drill 0.35)
  Top 0.152: MOD5.6 31.5,15.24 24.89,21.84 24.89,30.46 27.56,33.13 v27.56,38.61 | IC2.5 v24.89,41.15
  Bottom 0.152: v24.89,41.15 27.5,38.54 v27.56,38.61
LED6  (via drill 0.35)
  Top 0.152: MOD6.6 51.82,10.79 43.81,18.8 v41.91,18.8 | v24.89,39.75 23.11,39.75 IC2.6
  Bottom 0.152: v41.91,18.8 28.32,32.39 28.32,36.32 v24.89,39.75
LED7  (via drill 0.35)
  Top 0.152: MOD7.6 72.14,10.67 66.84,15.96 v66.8,15.96 | v24.89,38.61 IC2.7
  Bottom 0.152: v24.89,38.61 25.15,38.61 27.69,36.07 27.69,32 43.82,15.87 66.71,15.87 v66.8,15.96
LED8  (via drill 0.35)
  Top 0.152: MOD8.6 92.46,10.54 v87.88,15.11 | v24.88,37.33 24.87,37.34 IC2.8
  Bottom 0.152: v24.88,37.33 26.53,35.68 26.53,31.91 43.37,15.08 87.85,15.08 v87.88,15.11
LICK1  (via drill 0.35)
  Top 0.152: U1.2 v22.29,58.29 v22.28,58.28
  Bottom 0.152: R7.2 17.97,77.47 11.63,71.12 | 11.63,71.12 MOD1.7 | 11.63,71.12 11.75,71.12 21.78,61.1 21.78,58.79 v22.28,58.28
LICK1_2_5_6_OR
  Top 0.152: 58.43,56.21 U4.13 57.16,56.21 55.89,54.94 U4.3
LICK1_2_OR
  Top 0.152: U4.1 54.08,57.61 45.49,57.61 U3.3
LICK1_DIG
  Top 0.152: U3.1 44.49,59.56 44.35,59.42 44.35,59.31 41.72,56.68 32.37,56.68 31.42,57.63 U1.18 29.59,57.63 27.19,55.22 27.19,51.68 30.23,48.64 R15.1
LICK2  (via drill 0.35)
  Top 0.152: 18.29,54.74 20.53,56.98 U1.4 | 18.29,54.74 15.24,51.69 v15.11,51.69 | 18.29,54.74 18.29,58.23 R8.2
  Bottom 0.152: v15.11,51.69 14.22,50.8 MOD2.7
LICK2_DIG
  Top 0.152: U3.2 44.2,58.29 41.92,56.01 31.14,56.01 30.81,56.33 U1.16 29.51,56.33 28,54.82 28,52.27 30.35,49.91 R16.1
LICK3
  Top 0.152: U1.6 21.39,55.68 18.1,52.39 R9.2
  Bottom 0.152: R9.2 18.1,37.59 10.99,30.48 MOD3.7
LICK3_4_7_8_OR
  Top 0.152: U4.6 55.67,51.13 56.8,52.26 56.8,53.49 58.24,54.94 U4.12
LICK3_4_OR
  Top 0.152: U3.6 45.59,53.21 46.2,53.82 52.03,53.82 53.45,52.4 U4.5
LICK3_DIG
  Top 0.152: U3.4 44.78,55.88 42.68,55.88 41.83,55.03 U1.14 29.41,55.03 28.81,54.44 28.81,52.72 30.35,51.18 R17.1
LICK4
  Top 0.152: MOD4.7 10.16,14.6 18.93,23.38 18.93,51.06 22.25,54.38 U1.8
  Bottom 0.152: MOD4.7 9.02,8 7.62,9.4 7.62,16 5.85,17.78 R10.2
LICK4_DIG
  Top 0.152: U3.5 42.62,54.48 41.88,53.75 30.24,53.75 30.23,53.73 U1.12 31.87,53.73 33.32,52.28 R18.1
LICK5  (via drill 0.35)
  Top 0.152: R11.2 27.6,17.87 30.48,14.99 MOD5.7 31.08,8 32.56,9.48 32.56,15.26 34.46,17.16 v34.46,27.3 | v31.62,52.96 31.5,53.08 U1.11
  Bottom 0.152: v31.62,52.96 31.75,52.96 37.76,46.95 37.76,30.61 v34.46,27.3
LICK5_6_OR
  Top 0.152: U3.11 52.88,55.75 53.33,56.21 U4.2
LICK5_DIG  (via drill 0.35)
  Top 0.152: 30.27,60.6 31.01,61.34 R32.1 | v47.88,58.93 49.2,58.93 U3.13 | 30.27,60.6 30.97,60.6 v30.99,60.58 | 30.27,60.6 28.75,59.08 28.75,57.61 24.87,53.73 U1.9
  Bottom 0.152: v47.88,58.93 46.61,60.2 31.37,60.2 v30.99,60.58
LICK6  (via drill 0.35)
  Top 0.152: R12.2 43.37,17.84 50.8,10.41 MOD6.7 | v31.62,54.36 30.16,54.36 U1.13
  Bottom 0.152: R12.2 43.18,25.4 38.35,30.23 38.35,47.75 31.75,54.36 v31.62,54.36
LICK6_DIG  (via drill 0.35)
  Top 0.152: 28.76,60.65 30.73,62.61 R33.1 | U1.7 24.91,55.03 27.81,57.94 27.81,59.7 28.76,60.65 | v47.88,57.02 U3.12 | v29.59,60.58 29.53,60.65 28.76,60.65
  Bottom 0.152: v29.59,60.58 30.48,59.69 45.21,59.69 v47.88,57.02
LICK7  (via drill 0.35)
  Top 0.152: MOD7.7 71.12,10.41 63.56,17.97 R13.2 | v31.62,55.5 30.31,55.5 U1.15
  Bottom 0.152: v31.62,55.5 38.99,48.13 38.99,30.61 49.59,20.01 61.46,20.01 R13.2
LICK7_8_OR
  Top 0.152: U4.4 54.36,53.82 55.75,53.82 56.19,53.39 56.19,52.44 55.56,51.82 49.96,51.82 U3.8
LICK7_DIG  (via drill 0.35)
  Top 0.152: U1.5 25.03,56.32 26.62,57.92 26.62,60 27.2,60.58 | U3.10 v48.13,54.48 | 27.2,60.58 v27.94,60.58 | R34.1 30.63,64.01 27.2,60.58
  Bottom 0.152: v27.94,60.58 29.34,59.18 43.43,59.18 v48.13,54.48
LICK8  (via drill 0.35)
  Top 0.152: MOD8.7 91.44,10.21 83.82,17.83 R14.2 | v31.5,56.9 31.41,56.98 U1.17
  Bottom 0.152: v31.5,56.9 31.5,56.77 39.5,48.77 39.5,31.12 49.81,20.8 80.86,20.8 83.69,17.97 R14.2
LICK8_DIG  (via drill 0.35)
  Top 0.152: U1.3 24.24,57.62 24.77,57.62 25.55,58.4 25.55,60.4 25.73,60.58 | 25.73,60.58 30.43,65.28 R35.1 | v48.13,53.21 U3.9 | 25.73,60.58 v26.42,60.58
  Bottom 0.152: v26.42,60.58 28.32,58.67 42.67,58.67 v48.13,53.21
LICK_BUS_INT  (via drill 0.35)
  Top 0.15: 50.62,62.5 50.95,62.5 U7.3
  Top 0.152: IC1.19 v47.12,40.89 | v50.57,61.41 50.04,61.41 R37.1 50.55,62.1 50.95,62.5
  Bottom 0.152: v47.12,40.89 53.54,40.89 59.78,47.13 60.43,47.78 60.5,47.85 60.5,54.91 54,61.41 v50.57,61.41
LICK_BUS_INT2
  Top 0.152: R36.1 57.48,64.26 58.87,65.65 65.22,65.65 67.7,63.16 JP3.1
LICK_IN
  Top 0.152: U4.9 62.89,51.13 63.9,52.14 63.9,59.16 60.25,62.81 58.06,62.81 55.77,60.52 43.3,60.52 40.44,63.37 R3.2 40.44,68 39.98,68.45 LICK_IN.1
LICK_OUT
  Top 0.152: R25.2 70.38,65.88 69.36,64.87 69.36,55.83 63.65,50.12 59.39,50.12 U4.8
M0
  Top 0.152: JP1.2 138.72,57.91 137.46,56.66 137.46,54.34 140.08,51.72 140.08,16.78 135.21,11.92 U2.5
M1
  Top 0.152: U2.9 134.73,22.08 139.29,26.65 139.29,51.73 137.06,53.97 137.06,57.91 139.19,60.04 JP1.3
M2
  Top 0.152: JP1.4 139.19,62.58 136.52,59.91 136.52,53.85 138.56,51.82 138.56,28.34 134.83,24.62 U2.10
MOD_OR
  Top 0.152: U4.10 U4.11
N$1
  Top 0.152: IC1.15 43.69,45.97 43.6,46.07 R20.2 41.95,46.07 A0.2
N$2
  Top 0.152: A1.2 42.38,42.8 R19.2 43.13,43.56 43.34,43.56 44.49,44.7 IC1.16
N$3
  Top 0.152: A2.2 41.42,40.69 R21.2 43.18,40.69 43.87,41.38 43.88,41.38 43.88,42.93 44.45,43.5 45.28,43.5 IC1.17 | IC1.17
N$4
  Top 0.152: R25.1 72.09,66.48 79.94,66.48 LICK_OUT.1
N$5
  Top 0.152: R22.2 30.73,26.49 29.93,27.29 29.35,27.29 29.34,27.3 | IC2.16 33.25,30.99 33.74,30.49 33.74,29.2 32.79,28.24 30.03,28.24 29.34,27.56 29.34,27.3 | 29.34,27.3 B1.2
N$6
  Top 0.152: IC2.17 33.27,32.26 34.17,31.36 34.17,28.74 32.64,27.2 B2.2 32.42,27.16 32.98,27.16 33.66,26.48 R24.2
N$7
  Top 0.152: U8.3 43.35,62.26 42.21,62.26 41.78,62.68 41.78,66.24 43.43,67.89 47.88,67.89 R27.1 49.4,69.29 51.23,67.46 59.72,67.46 CLOCK_IN.1
N$8
  Top 0.152: U8.4 46.5,62.37 47.57,63.45 R26.2
N$10
  Top 0.152: R15.2 40.64,48.64 40.99,48.29 47.47,48.29 49.53,46.23 49.53,33.47 53.54,29.46 IC1.1
N$11
  Top 0.152: R16.2 40.26,49.91 41.4,48.77 47.75,48.77 50.04,46.48 50.04,34.11 53.41,30.73 IC1.2
N$12
  Top 0.152: R17.2 39.75,51.18 41.78,49.15 48.13,49.15 50.55,46.74 50.55,34.8 53.34,32 IC1.3
N$13
  Top 0.152: R18.2 39.41,52.28 42.16,49.53 48.39,49.53 51.05,46.86 51.05,35.56 53.34,33.27 IC1.4
N$14  (via drill 0.35)
  Top 0.152: R32.2 39.5,58.98 v39.5,57.79 | IC1.5 53.21,34.54 51.56,36.2 51.56,47.12 48.77,49.91 42.53,49.91 39.5,52.94 v39.5,52.98
  Bottom 0.152: v39.5,57.79 v39.5,52.98
N$15  (via drill 0.35)
  Top 0.152: R33.2 40.29,59.46 v40.29,57.79 | IC1.6 53.34,35.81 52.07,37.08 52.07,47.24 49.02,50.29 42.81,50.29 40.28,52.82 v40.28,52.96
  Bottom 0.152: v40.29,57.79 40.29,52.99 40.28,52.98 v40.28,52.96
N$16  (via drill 0.35)
  Top 0.152: v41.07,57.79 41.07,60.08 R34.2 | v41,52.96 41,52.83 43.16,50.67 49.28,50.67 52.58,47.37 52.58,37.85 53.34,37.08 IC1.7
  Bottom 0.152: v41.07,57.79 v41.06,57.78 41.06,53.01 v41,52.96
N$17  (via drill 0.35)
  Top 0.152: R35.2 41.72,60.7 v41.72,57.83 | IC1.8 53.85,38.35 53.21,38.99 53.21,47.24 49.4,51.05 43.44,51.05 41.66,52.84 v41.66,52.96
  Bottom 0.152: v41.66,52.96 41.72,53.02 v41.72,57.83
N$18
  Top 0.152: U7.4 55.13,62.5 R36.2
N$36
  Top 0.152: R1.2 R4.2 102.54,21.75 100.66,19.87 U$1.P$3 U$1.P$4
N$37
  Top 0.152: R2.2 R5.2 89.99,19.95 U$2.P$3
  Bottom 0.152: U$2.P$3 U$2.P$4
REV
  Top 0.152: R2.1 92.68,25 95.09,27.41 100.11,27.41 104.63,31.93 110.66,31.93 112.31,33.58 124.98,33.58 128.72,37.32 U2.15
SCL  (via drill 0.35)
  Top 0.152: Q3.3 118.46,56.13 119.22,55.37 R30.1 | IC1.12 54.87,43.56 55.57,43.56 59.66,47.65 | 59.66,47.65 61.04,49.03 64.07,49.03 77.11,62.06 v77.1,62.07 | 117.65,56.22 Q3.3 | IC2.12 24.64,32.26 25.91,33.53 25.91,46.1 27.5,47.69 v45.23,47.69 | v117.62,57.1 117.65,57.08 Q3.3 | 59.66,47.65 v59.65,47.66
  Bottom 0.152: v45.23,47.69 45.24,47.71 59.61,47.71 v59.65,47.66 | v77.1,62.07 78.19,63.17 114.48,63.17 117.62,60.02 v117.62,57.1
SCL_PI
  Top 0.152: RPI_CONN.6 107.13,51.17 108.41,52.45 111.13,52.45 113.87,55.18 R28.1 115.29,55.42 Q3.2
SD1  (via drill 0.35)
  Top 0.152: IC2.21 31.37,37.34 30.89,37.82 v30.89,37.85
  Bottom 0.152: MOD1.3 11.18,67.06 16.13,62.1 16.13,46.86 17.4,45.59 24.38,45.59 30.73,39.24 30.76,39.24 30.76,37.97 v30.89,37.85
SD2  (via drill 0.35)
  Top 0.152: IC2.22 32.26,38.73 v30.1,38.73
  Bottom 0.152: MOD2.3 14.48,46.74 16.89,44.32 24.38,44.32 29.97,38.73 v30.1,38.73
SD3  (via drill 0.35)
  Top 0.152: IC2.23 32.51,39.88 32.49,39.9 30.15,39.9 28.88,38.63 28.88,32.64 26.35,30.11 v26.35,30.04
  Bottom 0.152: MOD3.3 11.81,26.42 15.52,30.12 26.26,30.12 v26.35,30.04
SD4  (via drill 0.35)
  Top 0.152: IC2.24 33.66,41.15 35.18,39.62 v35.18,20.74 | v23.37,19.3 18.82,19.3 14.22,14.7 MOD4.3
  Bottom 0.152: v23.37,19.3 23.5,19.18 33.78,19.18 35.22,20.62 35.22,20.7 v35.18,20.74
SD5
  Top 0.152: MOD5.3 34.54,11.18 35.65,12.28 35.65,40.3 33.53,42.42 IC2.25
SD6
  Top 0.152: IC2.26 33.21,43.69 36.14,40.76 36.14,28.98 54.86,10.26 MOD6.3
SD7
  Top 0.152: MOD7.3 75.18,11.26 64.88,21.56 44.53,21.56 36.63,29.47 36.63,41.25 32.9,44.98 32.41,44.98 IC2.27
SD8
  Top 0.152: MOD8.3 95.5,12.4 86.56,21.35 86.52,21.35 85.58,22.29 44.67,22.29 37.07,29.89 37.07,42.08 32.9,46.25 32.41,46.25 IC2.28
SDA  (via drill 0.35)
  Top 0.152: R29.2 119.1,59.56 118.46,60.2 Q4.3 117.65,62.18 v117.22,62.61 117.22,62.5 | IC2.13 24.26,30.99 26.95,33.68 26.95,46.02 28.03,47.1 45.11,47.1 v45.17,47.04 | v77.18,62.88 77.16,62.9 63.83,49.56 60.48,49.56 v58.17,47.24 55.63,44.7 IC1.13 54.62,44.58
  Bottom 0.152: v45.17,47.04 45.33,47.2 58.12,47.2 v58.17,47.24 | v77.18,62.88 78.32,64.02 115.81,64.02 v117.22,62.61
SDA_PI
  Top 0.152: Q4.2 115.4,59.38 R31.2 110.24,59.38 108.21,57.36 108.21,55.06 107.31,54.16 107.31,54.09 RPI_CONN.4
STEP
  Top 0.152: U2.11 135.07,27.16 137.64,29.73 137.64,51.96 135.99,53.61 135.99,67.16 139.19,70.36 JP1.7
USB_SHIELD  (3 unrouted)
VALVE1
  Top 0.406: U5.16 69.06,48.37 74.47,53.78 VALVE1.1
VALVE1_PROG
  Top 0.152: U5.1 61.47,48.37 61.46,48.38 58.51,45.42 58.51,29.68 57.53,28.7 53.21,28.7 48.98,32.93 48.98,35.45 46.08,38.35 IC1.21
VALVE2  (via drill 0.35)
  Top 0.406: U5.15 69.7,47.1 76.05,53.45 v79.6,53.45
  Bottom 0.406: v79.6,53.45 81.2,53.45 VALVE2.1
VALVE2_PROG
  Top 0.152: U5.2 62.05,47.12 61.09,47.12 58.91,44.94 58.91,29.4 57.78,28.27 52.63,28.27 48.51,32.39 48.51,34.33 45.76,37.08 IC1.22
VALVE3  (via drill 0.35)
  Top 0.406: U5.14 70.2,45.83 76.68,52.3 v79.73,52.3
  Bottom 0.406: v79.73,52.3 91.11,52.3 VALVE3.1
VALVE3_PROG
  Top 0.152: U5.3 61.87,45.83 59.32,43.28 59.32,29.22 57.94,27.84 52.03,27.84 48.11,31.76 48.11,33.37 45.66,35.81 IC1.23
VALVE4
  Top 0.406: VALVE4.1 74.09,44.56 U5.13
VALVE4_PROG
  Top 0.152: U5.4 61.87,44.56 59.72,42.41 59.72,28.99 58.01,27.28 51.69,27.28 47.57,31.39 47.57,32.63 45.66,34.54 IC1.24
VALVE5  (via drill 0.35)
  Top 0.406: v79.07,43.33 67.57,43.33 U5.12
  Bottom 0.406: v79.07,43.33 83.79,43.33 VALVE5.1
VALVE5_PROG
  Top 0.152: U5.5 60.13,41.35 60.13,28.76 58.04,26.67 51.44,26.67 47.12,30.99 47.12,31.82 45.66,33.27 IC1.25
VALVE6  (via drill 0.35)
  Top 0.406: v78.17,42.04 78.15,42.02 U5.11
  Bottom 0.406: v78.17,42.04 93.41,42.04 VALVE6.1
VALVE6_PROG
  Top 0.152: U5.6 60.45,40.4 60.45,28.37 58.12,26.03 51.29,26.03 46.71,30.62 46.71,30.95 45.66,32 IC1.26
VALVE7  (via drill 0.35)
  Top 0.406: v69.87,40.74 67.53,40.74 U5.10
  Bottom 0.406: v69.87,40.74 71.61,40.74 74.34,38.01 VALVE7.1
VALVE7_PROG
  Top 0.152: U5.7 60.83,39.51 60.83,27.94 58.42,25.53 51.12,25.53 45.91,30.73 IC1.27
VALVE8
  Top 0.406: VALVE8.1 83.61,29.95 74.28,29.95 68.17,36.07 U6.16
VALVE8_PROG
  Top 0.152: U6.1 62.3,36.2 62.3,36.1 61.22,35.02 61.22,27.56 58.67,25.02 50.67,25.02 46.23,29.46 IC1.28

## Text on the board
SilkscreenTop: - | + | A2 | A1 | B1 | B2 | GND | DIR | FAULT | STEP | A2 | SLEEP | A1 | RESET | B1 | M2 | B2 | M1 | GND | M0 | VMOT | EN